# EAGLE board Hackpad pcb (EAGLE 9.7.0)
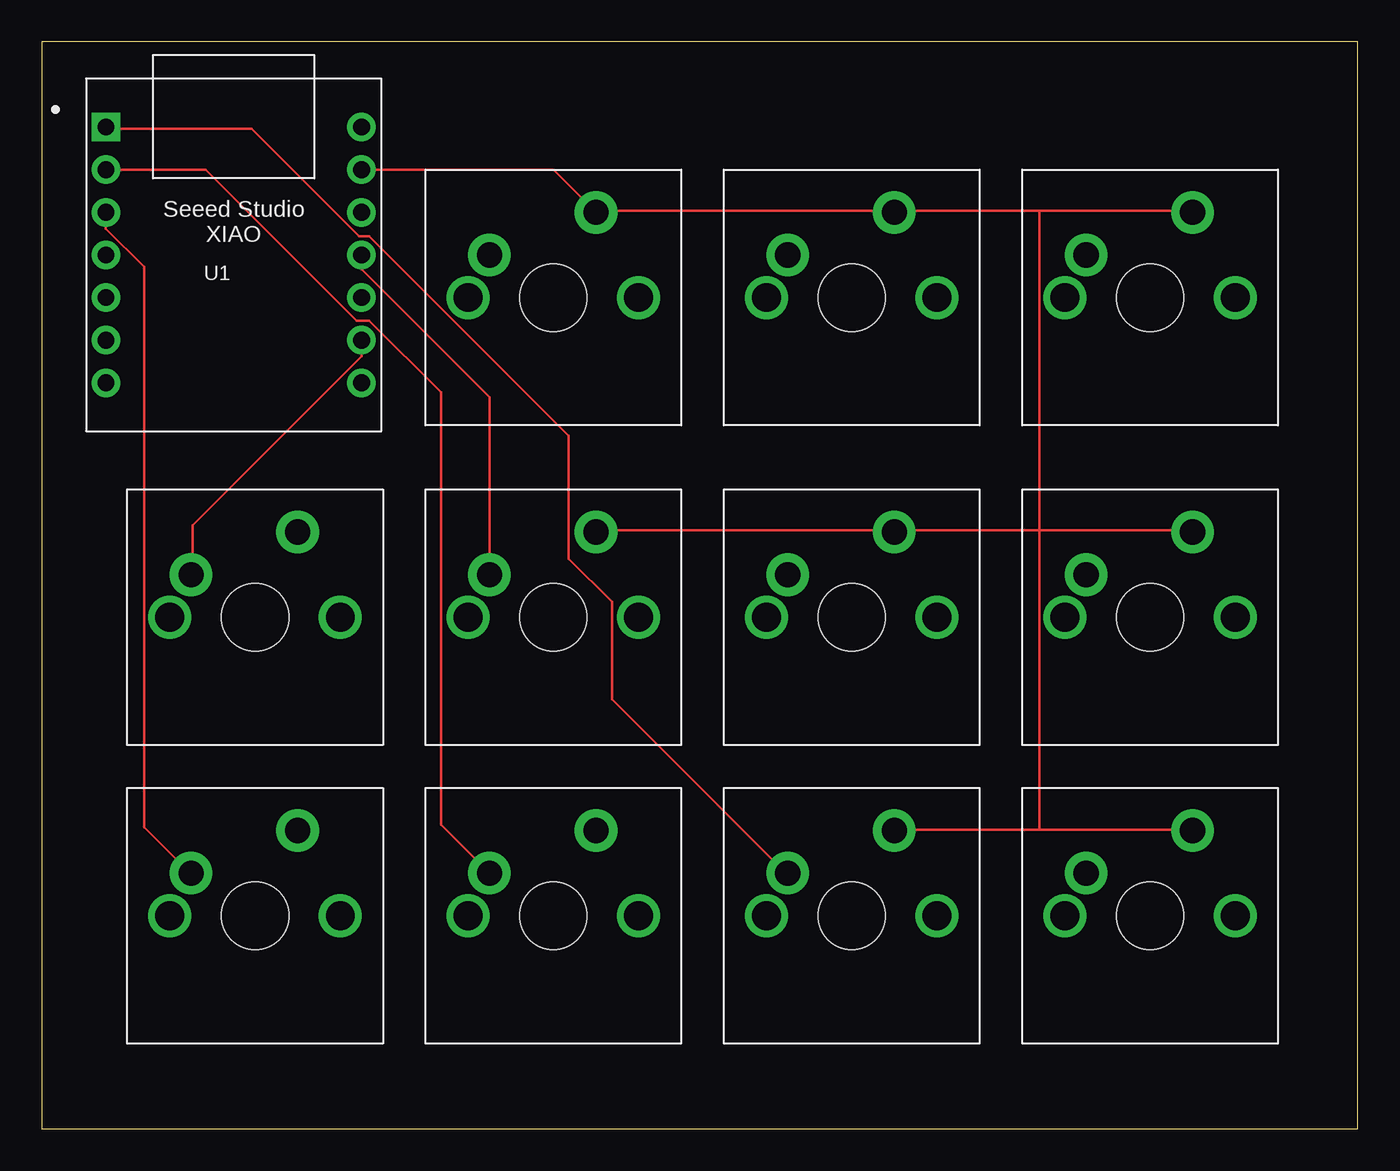
[diagram p0: board, top side]
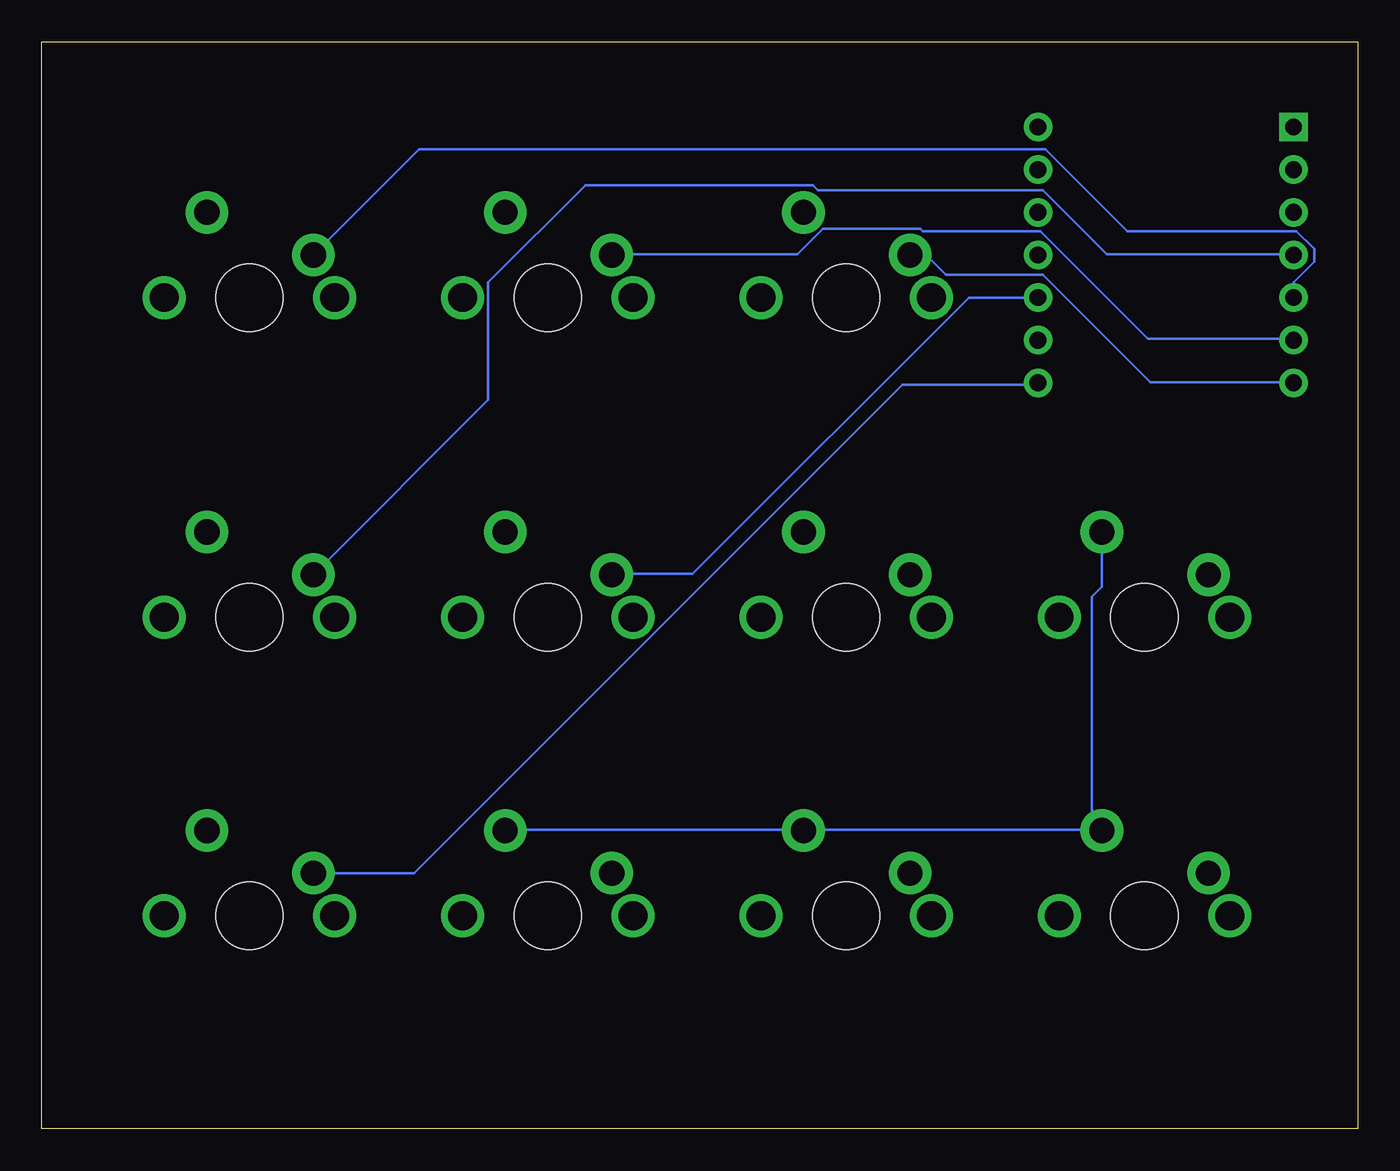
[diagram p1: board, bottom side, seen from below]

Size 78.41 x 64.76 mm. Coordinates in mm from the lower left corner, seen from the top.
Outline: 0,0 78.41,0 78.41,64.76 0,64.76 0,0
Copper layers (1*16): Top 0.035mm / dielectric 1.5mm / Bottom 0.035mm
Design rules "Fusion Electronics Design Rules": minimum track width 6mil, minimum drill 0.35mm, track to track 6mil, track to pad 6mil, pad to pad 6mil, via to via 6mil, smd to smd 6mil, copper to edge 40mil, drill to drill 6mil, minimum pad ring 10mil, minimum via ring 8mil, stop-mask expansion 4mil, vias tented up to drill 0mil, thermal gap 10mil

## Footprints (pad centres in the part's own frame; a part is rotated, then mirrored left to right if it is on the bottom)
XIAO-GENERIC-THRUHOLE-MODULE14P-2.54-21X17.8MM = drill 1 pad 1.7 square: 1 -7.62,7.62 | drill 1 pad 1.7: 2 -7.62,5.08; 3 -7.62,2.54; 4 -7.62,0; 5 -7.62,-2.54; 6 -7.62,-5.08; 7 -7.62,-7.62; 8 7.62,-7.62; 9 7.62,-5.08; 10 7.62,-2.54; 11 7.62,0; 12 7.62,2.54; 13 7.62,5.08; 14 7.62,7.62
CHERRY-MX = drill 1.714 pad 1.93: P$3 -5.08,0; P$4 5.08,0 | drill 1.5 pad 2.54: SW1 -3.81,2.54; SW2 2.54,5.08 | hole 4: 0,0

## Placement (x,y rotation side)
U1  XIAO-THRUHOLE  [XIAO-GENERIC-THRUHOLE-MODULE14P-2.54-21X17.8MM]  11.43,52.07 0 top
U$1  CHERRY-MX  [CHERRY-MX]  30.48,30.48 0 top
U$2  CHERRY-MX  [CHERRY-MX]  48.26,30.48 0 top
U$3  CHERRY-MX  [CHERRY-MX]  12.7,30.48 0 top
U$4  CHERRY-MX  [CHERRY-MX]  66.04,12.7 0 top
U$5  CHERRY-MX  [CHERRY-MX]  48.26,12.7 0 top
U$6  CHERRY-MX  [CHERRY-MX]  30.48,12.7 0 top
U$7  CHERRY-MX  [CHERRY-MX]  12.7,12.7 0 top
U$8  CHERRY-MX  [CHERRY-MX]  66.04,30.48 0 top
U$9  CHERRY-MX  [CHERRY-MX]  66.04,49.53 0 top
U$10  CHERRY-MX  [CHERRY-MX]  48.26,49.53 0 top
U$11  CHERRY-MX  [CHERRY-MX]  30.48,49.53 0 top

## Library data of the parts
U1 = Seeed Studio XIAO Series
U$1-U$11 = cherrymx

## Nets
GND: U1.13 U$1.SW2 U$2.SW2 U$3.SW2 U$4.SW2 U$5.SW2 U$6.SW2 U$7.SW2 U$8.SW2 U$9.SW2 U$10.SW2 U$11.SW2
N$1: U1.1 U$5.SW1
N$2: U1.2 U$6.SW1
N$3: U1.3 U$7.SW1
N$4: U1.4 U$8.SW1
N$5: U1.5 U$9.SW1
N$6: U1.6 U$10.SW1
N$7: U1.7 U$11.SW1
N$8: U1.11 U$1.SW1
N$9: U1.10 U$2.SW1
N$10: U1.9 U$3.SW1
N$11: U1.8 U$4.SW1

## Tracks (layer width: path | path; a pad name or v marks a point on that pad's centre or on a via)
GND
  Top 0.152: U1.13 30.48,57.15 U$11.SW2 33.07,54.71 50.75,54.71 U$10.SW2 50.9,54.71 59.44,54.71 | 59.44,54.71 68.58,54.71 U$9.SW2 | U$1.SW2 33.07,35.66 50.75,35.66 U$2.SW2 50.9,35.66 59.44,35.66 | 59.44,35.66 68.58,35.66 U$8.SW2 | 59.44,17.83 68.58,17.83 U$4.SW2 | 59.44,17.83 50.9,17.83 U$5.SW2 | 59.44,17.83 59.44,35.66 | 59.44,35.66 59.44,54.71
  Bottom 0.152: 15.85,17.83 32.92,17.83 U$6.SW2 33.07,17.83 50.75,17.83 U$5.SW2 | 15.85,17.83 15.24,17.83 U$7.SW2 15.85,17.83 | U$3.SW2 15.24,32.31 15.85,31.7 15.85,17.83
N$1
  Top 0.152: U1.1 3.81,59.59 12.5,59.59 18.9,53.19 19.51,53.19 31.39,41.3 31.39,33.98 33.98,31.39 33.98,25.6 44.35,15.24 U$5.SW1
N$2
  Top 0.152: U1.2 9.75,57.15 18.75,48.16 19.51,48.16 23.77,43.89 23.77,18.14 U$6.SW1
N$3
  Top 0.152: U1.3 3.81,53.65 6.1,51.36 6.1,17.98 8.84,15.24 U$7.SW1
N$4
  Bottom 0.152: U$8.SW1 51.82,43.43 51.82,50.44 46.02,56.24 32.46,56.24 32.16,55.93 18.75,55.93 14.94,52.12 3.81,52.12 U1.4
N$5
  Bottom 0.152: U1.5 3.81,50.44 2.59,51.66 2.59,52.43 3.66,53.49 13.72,53.49 18.59,58.37 55.93,58.37 U$9.SW1
N$6
  Bottom 0.152: U1.6 3.81,47.09 12.5,47.09 18.9,53.49 25.91,53.49 26.06,53.65 31.85,53.65 33.38,52.12 44.35,52.12 U$10.SW1
N$7
  Bottom 0.152: U1.7 3.81,44.5 12.34,44.5 18.75,50.9 24.54,50.9 25.6,51.97 26.67,51.97 U$11.SW1
N$8
  Top 0.152: U1.11 19.05,51.21 26.67,43.59 U$1.SW1
N$9
  Bottom 0.152: U1.10 23.16,49.53 39.62,33.07 44.35,33.07 U$2.SW1
N$10
  Top 0.152: U1.9 19.05,46.02 8.99,35.97 8.99,33.07 U$3.SW1
N$11
  Bottom 0.152: U$4.SW1 56.24,15.24 27.13,44.35 19.05,44.35 U1.8